# Altium PCB ParallelJoysticksVertical.PcbDoc
Units mm, origin at the board's own origin, x right, y up, seen from the top; angles counter-clockwise.
Board outline 34.8 x 53.2 mm, 4 copper layers (Top Layer, Ground, Signal Middle, Bottom Layer), stack 1.741 mm thick; 9 components, 29 nets, 107 pads, 36 vias.
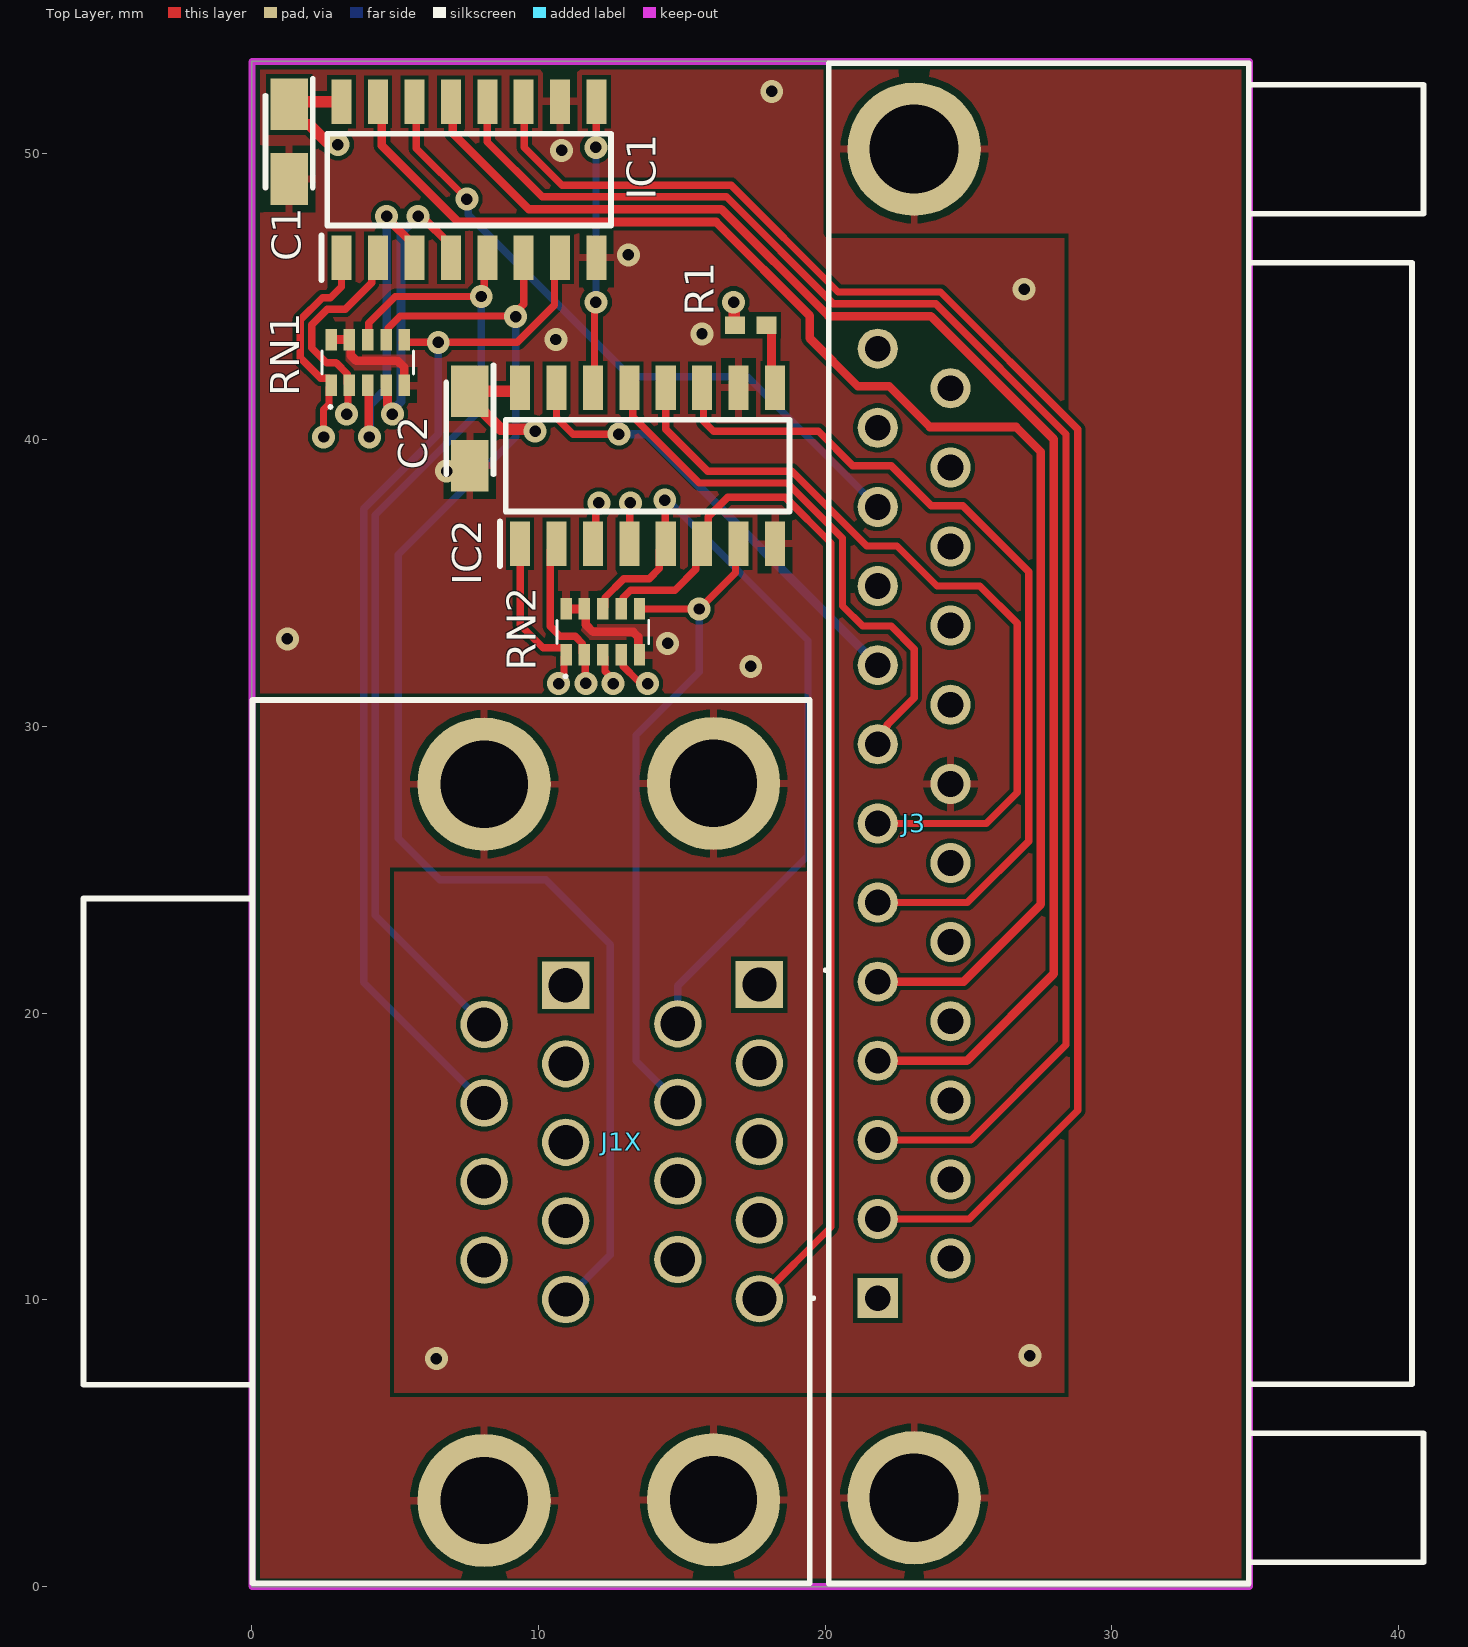
[diagram p0: Top Layer view]
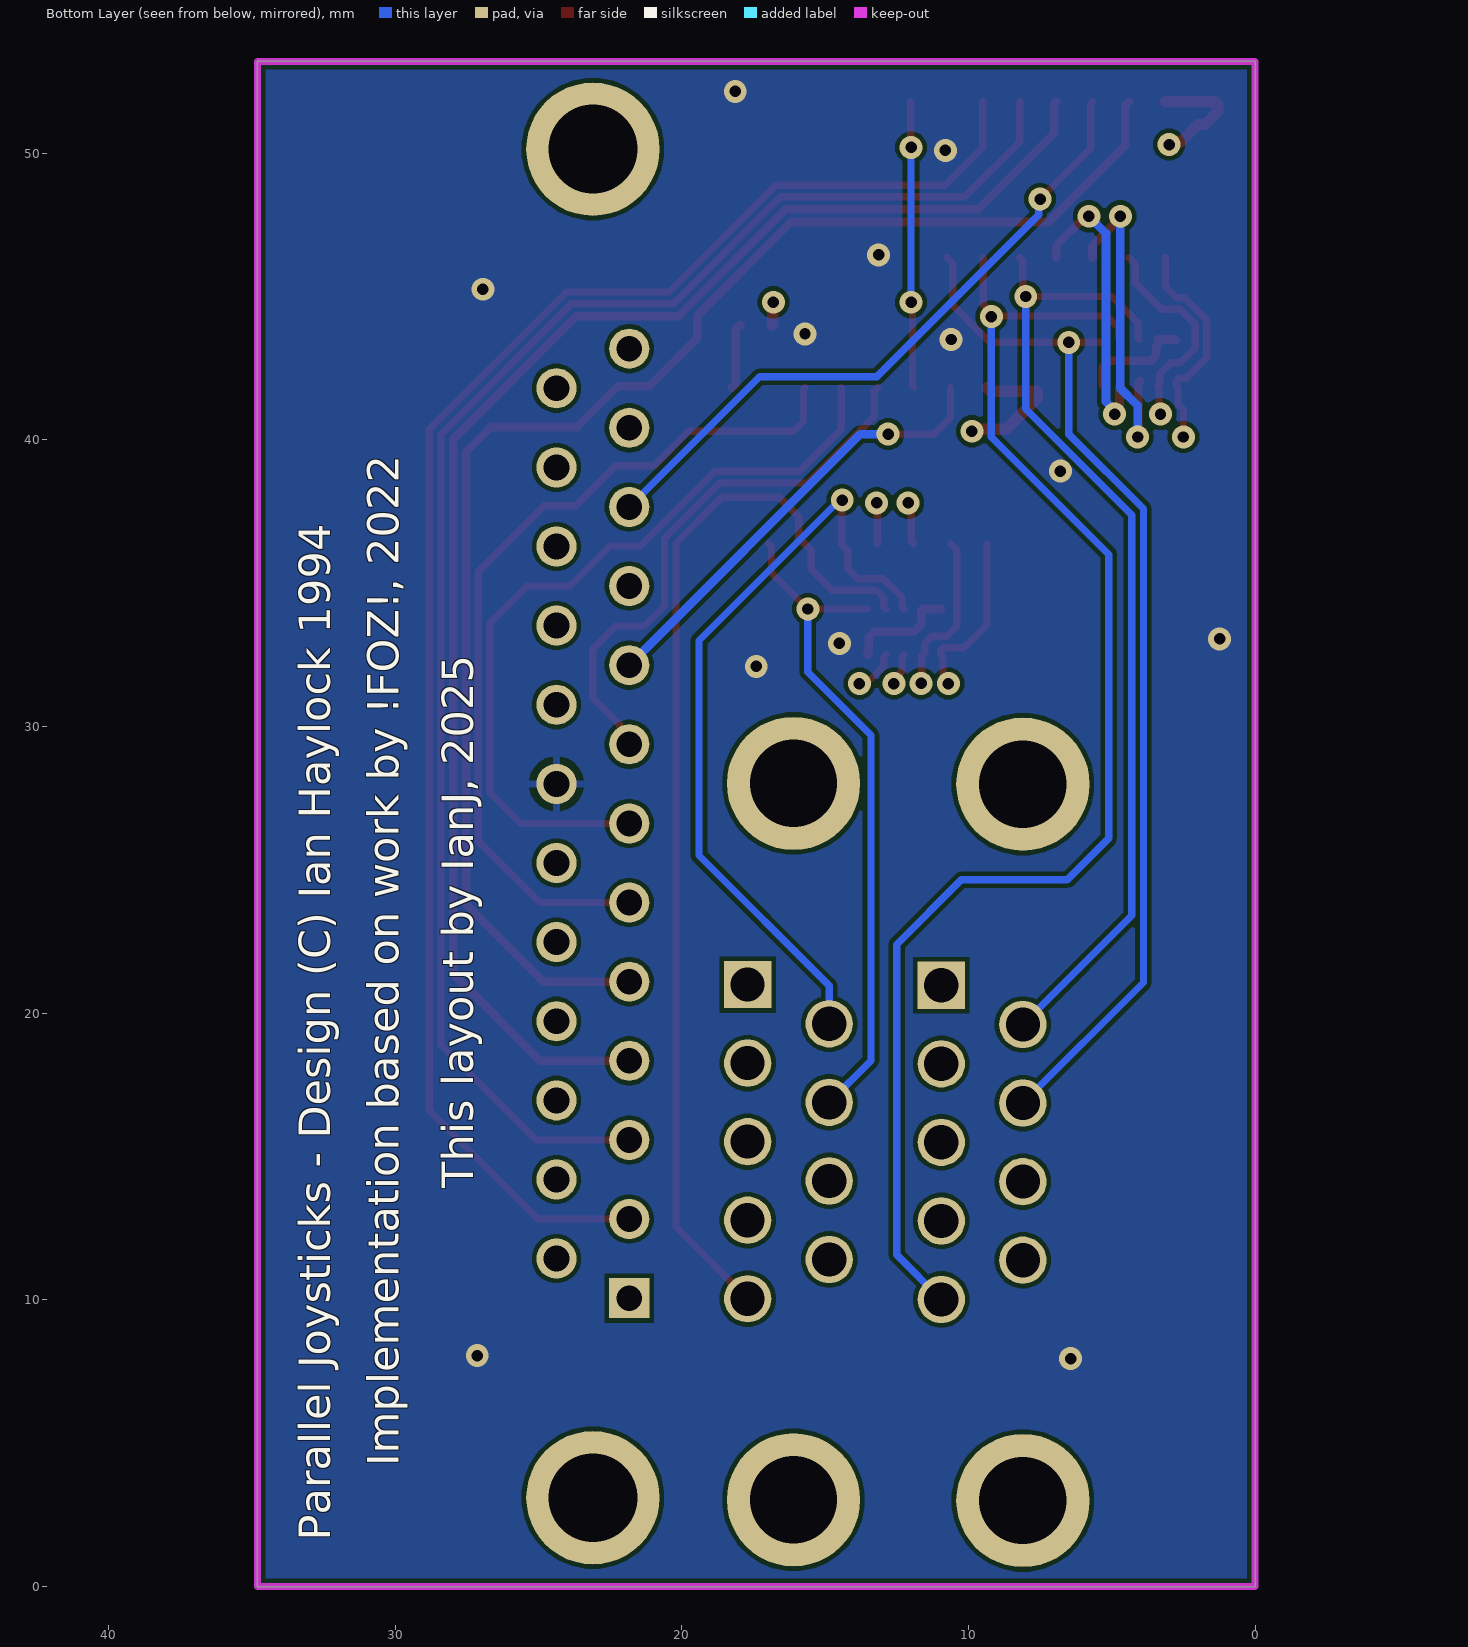
[diagram p1: Bottom Layer view, seen from below]
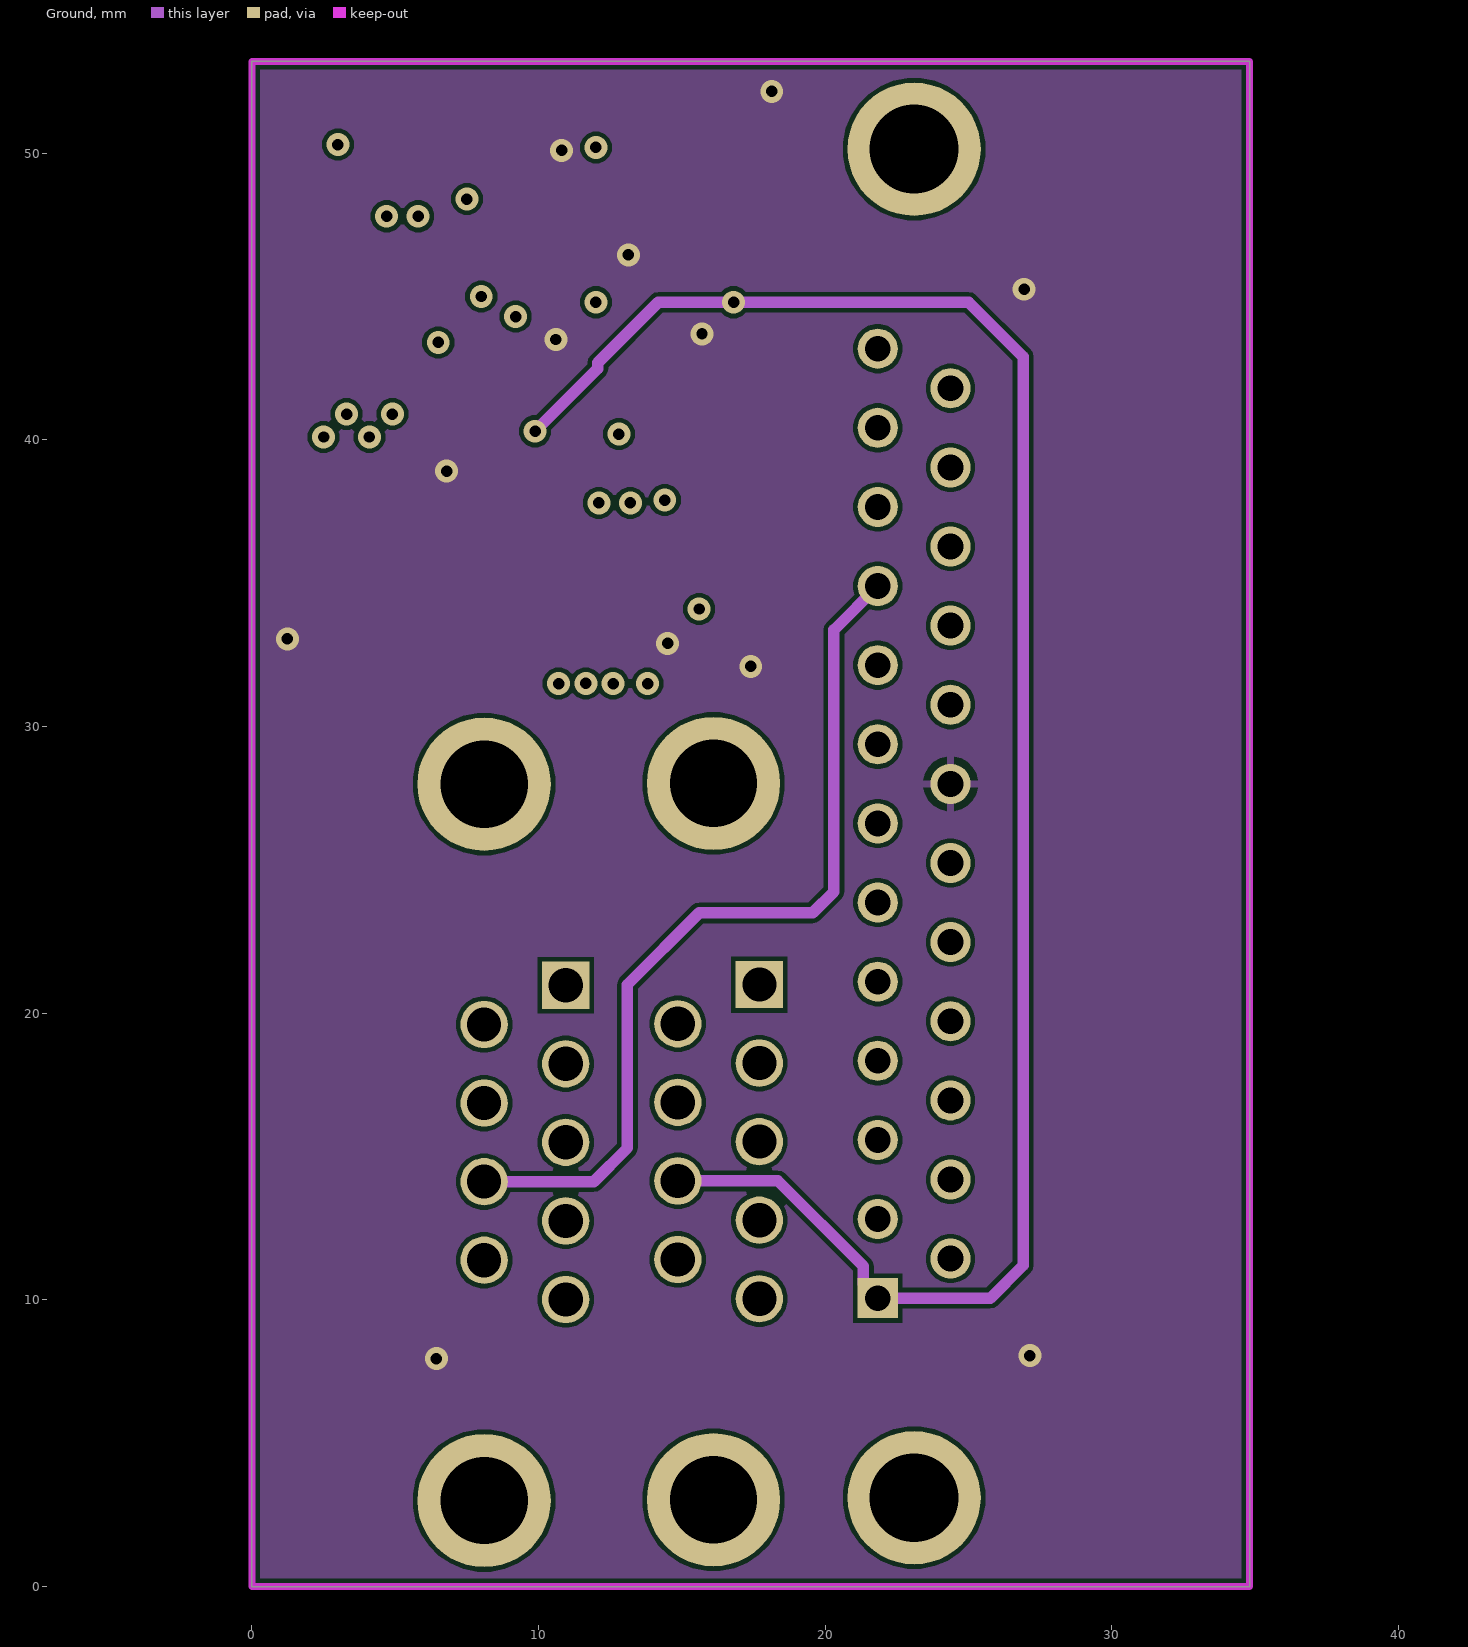
[diagram p2: Ground]
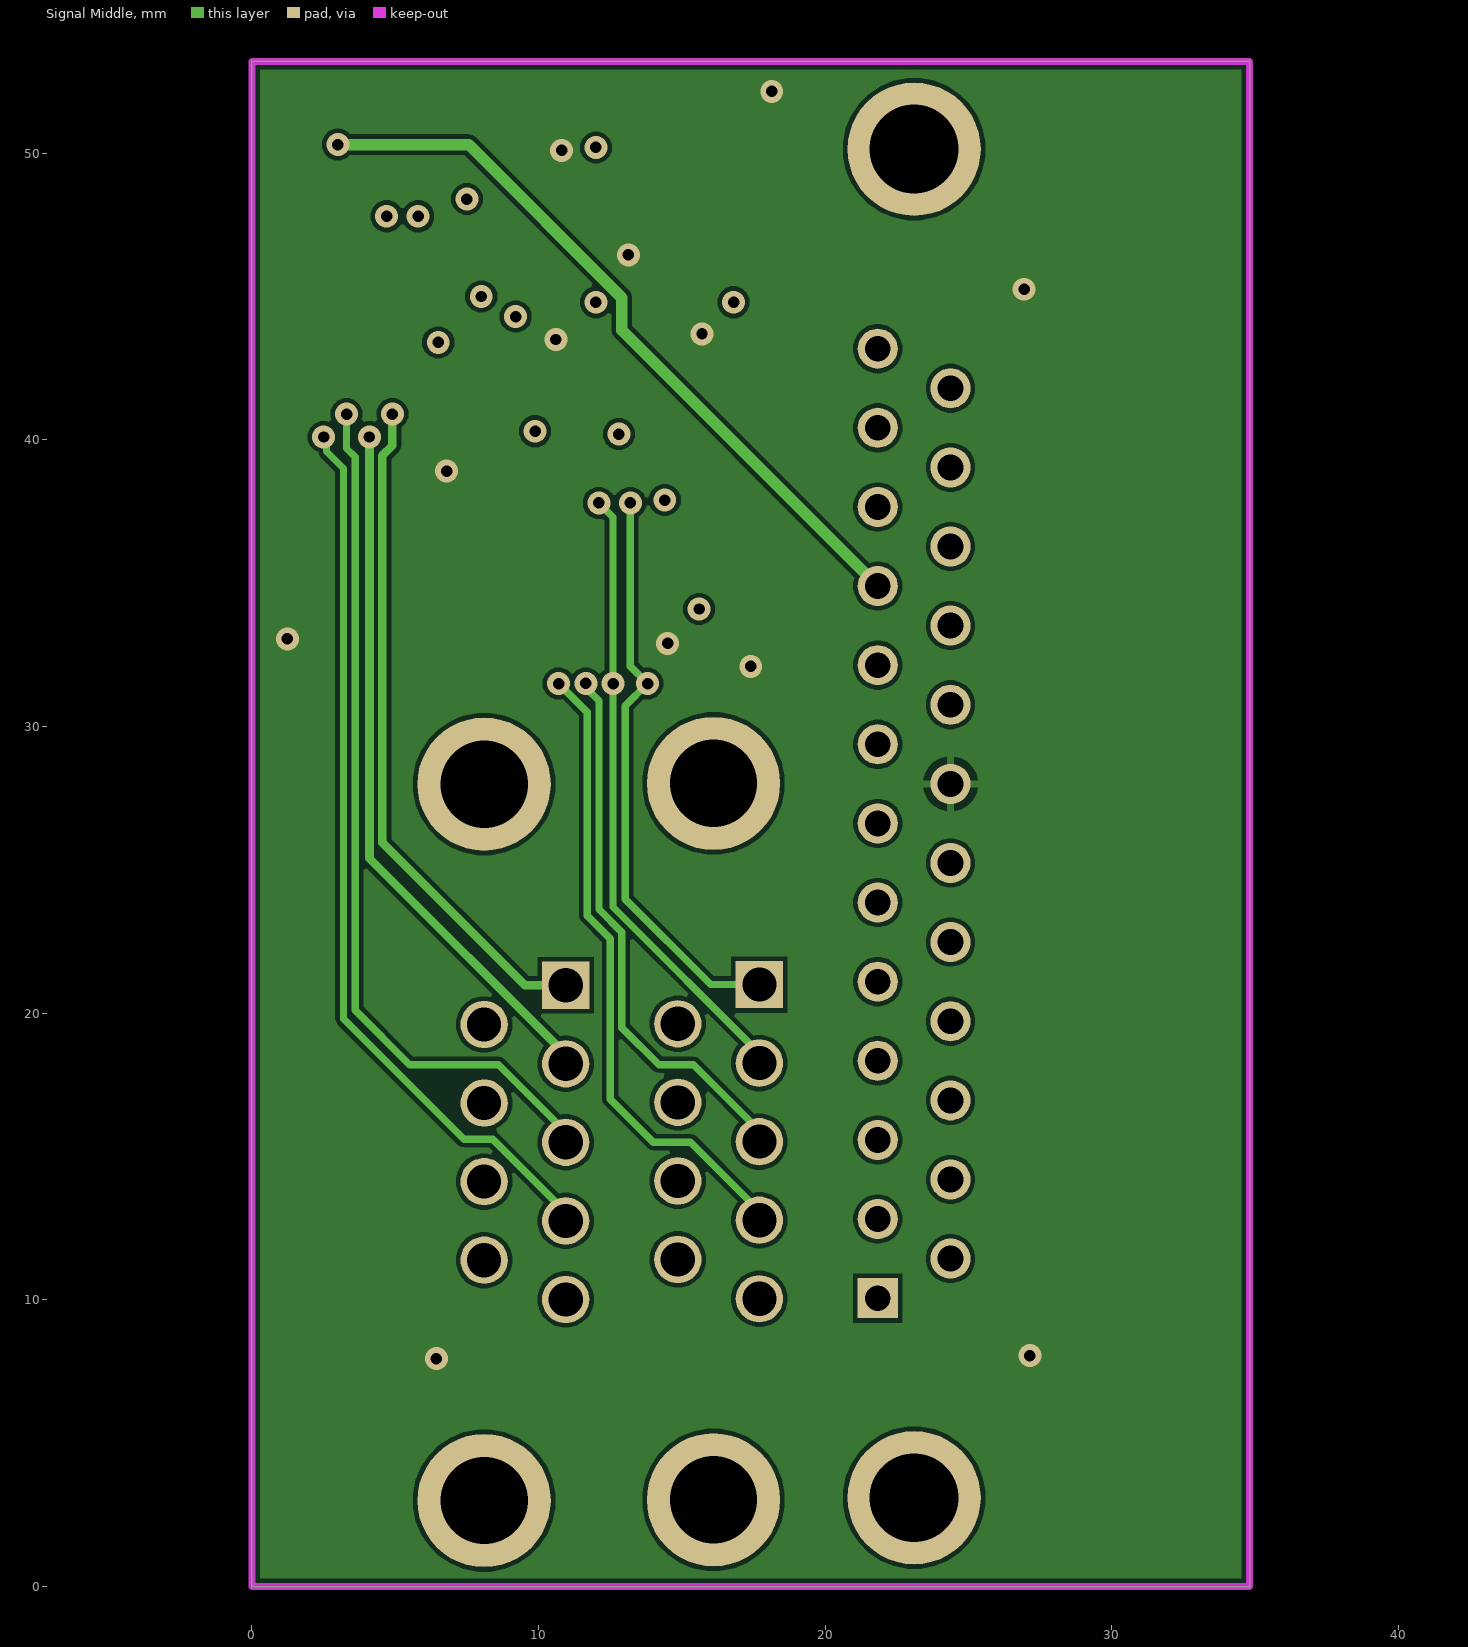
[diagram p3: Signal Middle]
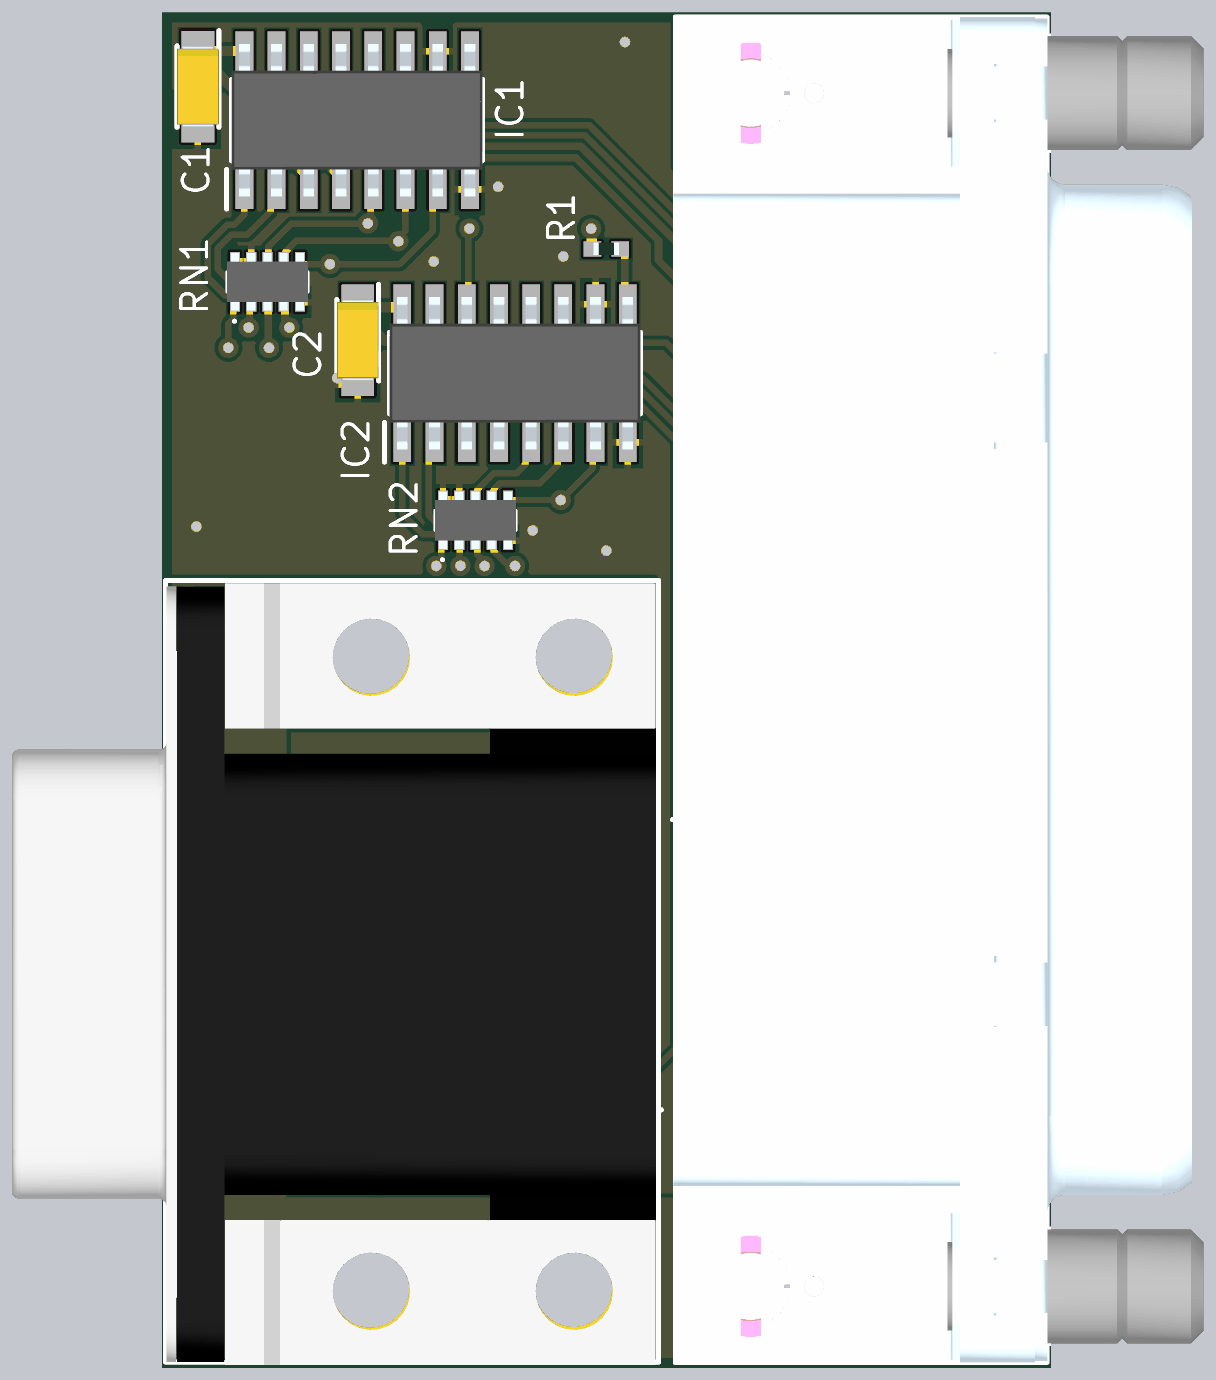
[diagram p4: 3D render of the assembled board from above, using the file's embedded part models]

## Layer stack, top to bottom
Top Solder: solder mask 0.0102, Solder Resist, Dk 3.5
Top Layer: signal copper 0.0356
Dielectric 1: dielectric 0.2, FR-4, Dk 4.8
Ground: signal copper 0.035
Dielectric 2: core 1.2, PP-006, Dk 4.1
Signal Middle: signal copper 0.035
Dielectric2: dielectric 0.2, FR-4, Dk 4.8
Bottom Layer: signal copper 0.0356
Bottom Solder: solder mask 0.0102, Solder Resist, Dk 3.5

## Board outline
0,0 0,53.2 34.8,53.2 34.8,0

## Design rules (kind name [scope] priority, off if disabled: settings)
Clearance [All] p1: gap=0.15 ignorepadtopadclearanceinfootprint=FALSE
HoleSize [All] p1: absolutevalues=TRUE maxlimit=5 minlimit=0.025 maxpercent=80.000 minpercent=20.000
MinimumSolderMaskSliver [All] p1: minsoldermaskwidth=0.05
PolygonConnect [All] p1: connectstyle=Relief reliefconductorwidth=0.254 reliefentries=4 polygonreliefangle="90 Angle" airgapwidth=0.254
RoutingVias [All] p1: holewidth=0.4 width=0.8 viastyle="Through Hole" minholewidth=0.4 minwidth=0.8 maxholewidth=0.8 maxwidth=1.27
SilkToSolderMaskClearance [IsPad] p1 off: minsilkscreentomaskgap=0.254 clearancetoexposedcopper=TRUE
SolderMaskExpansion [All] p1: expansion=0.102 istentingtop=FALSE
SupplyNets "Schematic Supply Nets_4" [InNet('VCCB')] p1: voltage=0.000
SupplyNets "Schematic Supply Nets_3" [InNet('VCCA')] p2: voltage=0.000
SupplyNets "Schematic Supply Nets_2" [InNet('SHLD')] p3: voltage=0.000
SupplyNets "Schematic Supply Nets" [InNet('GND')] p4: voltage=0.000
Width [All] p1: maxlimit=0.5 minlimit=0.254 preferedwidth=0.254 minimp=50.000000 maximp=50.000000 favimp=50.000000
27 further rules are at their usual default settings.

## Components (designator, comment, footprint, x,y, rotation, side; value= is the part's Value field where it differs from the comment)
C1 "10uF_1206" CAPPM3216X180N 1.3,50.4 r270 top
C2 "10uF_1206" CAPPM3216X180N 7.6,40.4 r270 top
IC1 "MC14512BDR2G" SOIC127P600X175-16N 7.575,49.075 r90 top
IC2 "MC14512BDR2G" SOIC127P600X175-16N 13.8,39.1 r90 top
J1X "189-009-613R491" 189-009-613R491 0.023,30.925 r270 top locked
J3 "D25P13A4GL00LF" D25P13A4GV00LF 21.83,10.06 r90 top locked
R1 "100K_0402" RESC1005X40N 17.4,44 r180 top
RN1 "YC158TJR-07100KL" YC158TJR07100KL 4.04,42.7 r90 top
RN2 "YC158TJR-07100KL" YC158TJR07100KL 12.24,33.3 r90 top

## Footprints (in the part's own frame and the unit in brackets; to place one, negate y for a bottom-side part, rotate by r counter-clockwise, add the part's x,y. Pads: shape width x height; smd on the part's side, far side on the other; paste and mask are expansions set on the pad)
189-009-613R491 [mil]
  rect 65x65 hole 47: B1(391.73,430) T1(390.75,696)
  round 65 hole 47: B2(499.61,430) B3(607.48,430) B4(715.35,430) B5(823.23,430) B6(445.67,318) B7(553.54,318) B8(661.42,318) B9(769.29,318) T2(498.62,696) T3(606.5,696) T4(714.37,696) T5(822.24,696) T6(444.69,584) T7(552.56,584) T8(660.43,584) T9(768.31,584)
  round 183.07 hole 120: M1(115.55,318) M2(114.57,633) M3(1099.41,318) M4(1098.43,633)
  silkscreen extent 0,-232 1213,789, body extent 5,-239 1218,761, height 1125
CAPPM3216X180N [mm]
  rect 1.8x1.3 smd: 1(-1.3,0) 2(1.3,0)
  silkscreen extent -2.2,-0.82 1.6,0.82, body extent -1.6,-0.82 1.6,0.82, height 1.8
D25P13A4GV00LF [mm]
  rect 1.4x1.4 hole 0.9: 1(0,0)
  round 1.4 hole 0.9: 2(2.76,0) 3(5.52,0) 4(8.28,0) 5(11.04,0) 6(13.8,0) 7(16.56,0) 8(19.32,0) 9(22.08,0) 10(24.84,0) 11(27.6,0) 12(30.36,0) 13(33.12,0) 14(1.38,-2.54) 15(4.14,-2.54) 16(6.9,-2.54) 17(9.66,-2.54) 18(12.42,-2.54) 19(15.18,-2.54) 20(17.94,-2.54) 21(20.7,-2.54) 22(23.46,-2.54) 23(26.22,-2.54) 24(28.98,-2.54) 25(31.74,-2.54)
  round 4.65 hole 3.1: 26(-6.96,-1.27) 27(40.08,-1.27)
  silkscreen extent -9.95,-19.04 43.07,2.3, body extent -9.96,-19.11 43.08,1.79, height 13.32
RESC1005X40N [mm]
  rect 0.7x0.6 smd: 1(-0.55,0) 2(0.55,0)
  body extent -0.5,-0.25 0.5,0.25, height 0.4
SOIC127P600X175-16N [mm]
  rect 1.55x0.7 smd: 1(-2.725,4.445) 2(-2.725,3.175) 3(-2.725,1.905) 4(-2.725,0.635) 5(-2.725,-0.635) 6(-2.725,-1.905) 7(-2.725,-3.175) 8(-2.725,-4.445) 9(2.725,-4.445) 10(2.725,-3.175) 11(2.725,-1.905) 12(2.725,-0.635) 13(2.725,0.635) 14(2.725,1.905) 15(2.725,3.175) 16(2.725,4.445)
  silkscreen extent -3.5,-4.95 1.6,5.15, body extent -3,-4.95 3,4.95, height 1.75
YC158TJR07100KL [mm]
  rect 0.75x0.4 smd: 1(-0.8,1.28) 2(-0.8,0.64) 3(-0.8,0) 4(-0.8,-0.64) 5(-0.8,-1.28) 6(0.8,1.28) 7(0.8,0.64) 8(0.8,0) 9(0.8,-0.64) 10(0.8,-1.28)
  silkscreen extent -1.6,-1.6 0.4,1.6, body extent -1.13,-1.6 1.13,1.6, height 0.8

## Part data
C1 C2: library part TAJA106M010RNJ, "Capacitor Polarised", Manufacturer_Name="Kyocera AVX", Mouser Part Number=581-TAJA106M010R, Arrow Part Number=TAJA106M010RNJ, Arrow Price/Stock=https://www.arrow.com/en/products/taja106m010rnj/avx?utm_currency=USD&region=nac, Datasheet Link=http://www.farnell.com/datasheets/1680476.pdf, Height=1.8mm, Manufacturer_Part_Number=TAJA106M010RNJ, Mouser Price/Stock=https://www.mouser.co.uk/ProductDetail/KYOCERA-AVX/TAJA106M010RNJ?qs=OVpPYgiJXXXkHCh9%252BEALWw%3D%3D
IC1 IC2: "Integrated Circuit", Manufacturer_Name=onsemi, Mouser Part Number=863-MC14512BDR2G, Arrow Part Number=MC14512BDR2G, Arrow Price/Stock=https://www.arrow.com/en/products/mc14512bdr2g/on-semiconductor, Datasheet Link=https://www.onsemi.com/pub/Collateral/MC14512B-D.PDF, Height=1.75mm, Manufacturer_Part_Number=MC14512BDR2G, Mouser Price/Stock=https://www.mouser.co.uk/ProductDetail/onsemi/MC14512BDR2G?qs=g2rIOKKlpoaxQ58M9hSKIg%3D%3D
J1X: "Connector"
J3: library part D25P13A4GV00LF, "Connector", Manufacturer_Name="Amphenol Communications Solutions", Datasheet Link=https://cdn.amphenol-cs.com/media/wysiwyg/files/drawing/c01-8646-0742.pdf, Height=13.86mm, Manufacturer_Part_Number=D25P13A4GL00LF
R1: library part CRCW0402100KFKEDHP, "Resistor", Manufacturer_Name=Vishay, Mouser Part Number=71-CRCW0402100KFKEDH, Arrow Part Number=CRCW0402100KFKEDHP, Arrow Price/Stock=https://www.arrow.com/en/products/crcw0402100kfkedhp/vishay?utm_currency=USD&region=nac, Datasheet Link=http://www.vishay.com/docs/20035/dcrcwe3.pdf, Height=0.4mm, Manufacturer_Part_Number=CRCW0402100KFKEDHP, Mouser Price/Stock=https://www.mouser.co.uk/ProductDetail/Vishay-Dale/CRCW0402100KFKEDHP?qs=k2%2FDWSARqgGFakjlJe4Ejw%3D%3D
RN1 RN2: "Resistor Network", Manufacturer_Name=KEMET, Mouser Part Number=603-YC158TJR-07100KL, Arrow Part Number=YC158TJR-07100KL, Arrow Price/Stock=https://www.arrow.com/en/products/yc158tjr-07100kl/yageo?region=nac, Datasheet Link=https://media.digikey.com/pdf/Data%20Sheets/Yageo%20PDFs/YC102-358,TC122-164_Series_DS.pdf, Height=0.7mm, Manufacturer_Part_Number=YC158TJR-07100KL, Mouser Price/Stock=https://www.mouser.com/Search/Refine.aspx?Keyword=603-YC158TJR-07100KL

## Via types
v1: diameter 0.8, hole 0.4, Top Layer to Bottom Layer, tented both sides, 36 vias

## Nets (pads, with @x,y where several pads share a name; then routed paths per layer and width w, separated by ;. In a path a pad name is that pad's centre, name@x,y a point inside that pad or via, vN(x,y) a via of type N, cw(c..) or ccw(c..) an arc to the next point about the centre after c; other vN are vias at no path point)
A_1: IC1.11 J3.2 | length 57.3
  Top Layer w0.254: IC1.11 9.5,51.78 9.5,50.2 10.819,48.881 16.719,48.881 20.446,45.154 24.017,45.154 28.804,40.367 28.804,16.604 25.02,12.82 J3.2
A_2: IC2.11 J3.6 | length 30.3
  Top Layer w0.254: IC2.11 15.752,41.778 15.752,40.648 16.1,40.3 19.761,40.3 20.961,39.1 22.3,39.1 23.7,37.7 24.8,37.7 27.096,35.404 27.096,26 24.956,23.86 J3.6
B_1: IC1.12 J3.3 | length 55.1
  Top Layer w0.254: IC1.12 8.21,50.39 10.123,48.477 16.552,48.477 20.279,44.75 23.85,44.75 28.4,40.2 28.4,18.9 25.08,15.58 J3.3
B_2: IC2.12 J3.7 | length 27.7
  Top Layer w0.254: IC2.12 14.435,40.365 15.9,38.9 18.843,38.9 21.443,36.3 22.5,36.3 23.9,34.9 25.392,34.9 26.692,33.6 26.692,27.7 25.612,26.62 J3.7
C_1: IC1.13 J3.4 | length 52.6
  Top Layer w0.3: IC1.13 7,51.74 7,50.7 9.65,48.05 16.375,48.05 20.109,44.316 23.68,44.316 27.973,40.023 27.973,21.373 24.94,18.34 J3.4
C_2: IC2.13 J3.8 | length 19.5
  Top Layer w0.254: IC2.13 13.282,41.708 13.282,40.818 15.604,38.496 18.675,38.496 20.604,36.567 20.604,34.207 21.308,33.503 22.297,33.503 23.1,32.7 23.1,31 22.165,30.065 22.165,30.025 21.83,29.69 J3.8
DIS_1: IC1.15 J3.5 | length 52.1
  Top Layer w0.3: IC1.15 4.531,51.669 4.531,50.269 7.2,47.6 16.188,47.6 19.458,44.331 19.458,43.542 21.126,41.874 22.226,41.874 23.652,40.448 26.652,40.448 27.523,39.577 27.523,23.8 24.823,21.1 J3.5
DIS_2: IC2.15 J3.9 | length 15.8
  Top Layer w0.254: IC2.15 10.625,40.775 11.2,40.2 v1(12.8,40.2)
  Bottom Layer w0.3: v1(12.8,40.2) 13.77,40.2 J3.9
GND: C1.2 C2.2 IC1.8 IC1.10 IC2.8 IC2.10 J3.20 RN1.5 RN1.6 RN1.7 RN2.5 RN2.6 RN2.7 | length 7.6
  Top Layer w0.3: RN1.6@2.76,43.45 2.81,43.5 RN1.7 ; RN1.7@3.4,43.325 3.45,43.275 3.45,42.95 3.638,42.762 5.082,42.762 5.32,42.524 RN1.5 ; RN2.6 RN2.7 11.65,34.05 11.65,33.55 11.9,33.3 13.294,33.3 13.47,33.124 13.47,32.55 RN2.5
  other v1: 6.434,7.954 27.134,8.054 17.4,32.1 14.5,32.9 1.234,33.054 6.791,38.909 10.6,43.5 15.7,43.7 26.934,45.254 13.134,46.454 10.8,50.1 18.134,52.154
NetIC2_9: IC2.9 R1.1 | length 2.3
  Top Layer w0.3: R1.1 17.973,44 18.123,43.85 18.123,41.947 IC2.9
SHLD: J1X.M1 J1X.M2 J1X.M3 J1X.M4 J3.26 J3.27
VCCA: C1.1 IC1.16 J1X.B8 J3.10 | length 61.2
  Top Layer w0.4: v1(3,50.3) 2.923,50.377 2.623,50.377 2,51 1.75,51 1.3,51.45 C1.1 1.4,51.8 IC1.16
  Ground w0.4: J1X.B8 11.925,14.125 13.1,15.3 13.1,21 15.6,23.5 19.561,23.5 20.3,24.239 20.3,33.37 J3.10
  Signal Middle w0.4: v1(3,50.3) 7.561,50.3 12.9,44.961 12.9,43.83 J3.10
VCCB: C2.1 IC2.16 J1X.T8 J3.1 R1.2 | length 71.8
  Top Layer w0.4: IC2.16 9.23,41.7 C2.1 7.6,41.45 8.677,40.373 9.804,40.373 v1(9.877,40.3) ; v1(16.8,44.8) 16.825,44.775 16.825,44.025 R1.2
  Ground w0.4: v1(9.877,40.3) 12.065,42.488 12.065,42.688 14.177,44.8 16.7,44.8 16.8,44.7 16.9,44.8 25,44.8 26.9,42.9 26.9,11.2 25.76,10.06 J3.1 21.33,10.56 21.33,11.17 18.35,14.15 J1X.T8
X0_1: IC1.1 J1X.B4 RN1.1 | length 39.2
  Top Layer w0.254: v1(2.5,40.1) 2.5,41.057 2.687,41.244 2.687,41.827 RN1.1 2.76,42.073 2.687,42.146 2.401,42.146 1.685,42.862 1.685,44.185 2.46,44.96 2.742,44.96 3.125,45.343 3.125,46.345 IC1.1
  Signal Middle w0.254: v1(2.5,40.1) 2.604,39.996 2.604,39.596 3.196,39.004 3.196,19.804 7.4,15.6 8.4,15.6 10.945,13.055 J1X.B4
X0_2: IC2.1 J1X.T4 RN2.1 | length 28.5
  Top Layer w0.254: IC2.1 9.355,33.545 10.152,32.748 10.887,32.748 10.96,32.675 RN2.1 10.887,32.427 10.887,31.837 10.698,31.648 v1(10.698,31.5)
  Signal Middle w0.254: v1(10.698,31.5) 10.698,31.496 11.7,30.494 11.7,23.4 12.5,22.6 12.5,17 14,15.5 15.3,15.5 17.701,13.099 J1X.T4
X1_1: IC1.2 J1X.B3 RN1.2 | length 37.9
  Top Layer w0.254: v1(3.3,40.9) 3.35,40.95 3.35,41.85 RN1.2 3.327,41.973 3.327,42.3 2.937,42.69 2.603,42.69 2.089,43.205 2.089,44.017 2.627,44.556 3.256,44.556 4.177,45.477 4.177,46.127 IC1.2
  Signal Middle w0.254: v1(3.3,40.9) 3.3,39.7 3.6,39.4 3.6,20.1 5.5,18.2 8.6,18.2 10.945,15.855 J1X.B3
X1_2: IC2.2 J1X.T3 RN2.2 | length 25
  Top Layer w0.254: IC2.2 10.402,36.152 10.402,33.498 10.748,33.152 11.275,33.152 11.527,32.9 11.527,32.573 11.636,32.464 11.624,32.451 11.624,31.528 v1(11.648,31.504)
  Signal Middle w0.254: v1(11.648,31.504) 11.648,31.356 12.104,30.9 12.104,23.625 12.904,22.825 12.904,19.496 14.2,18.2 15.4,18.2 17.291,16.309 ; 17.291,16.308 17.701,15.898 J1X.T3
X2_1: IC1.3 J1X.B2 RN1.3 | length 36.5
  Top Layer w0.3: RN1.3@4,42.052 4.07,41.982 4.07,40.13 v1(4.1,40.1) ; v1(4.7,47.8) 4.7,47.745 5.67,46.775 IC1.3
  Signal Middle w0.3: v1(4.1,40.1) 4.1,25.4 10.945,18.555 J1X.B2
  Bottom Layer w0.3: v1(4.1,40.1) 4.1,41.2 4.7,41.8 v1(4.7,47.8)
X2_2: IC2.3 J1X.T2 RN2.3 | length 24.5
  Top Layer w0.254: IC2.3 11.998,36.478 11.998,37.698 v1(12.1,37.8) ; RN2.3 12.313,32.427 12.313,31.931 12.598,31.646 v1(12.598,31.498)
  Signal Middle w0.254: v1(12.1,37.8) 12.598,37.302 v1(12.598,31.498) 12.598,23.702 17.701,18.599 J1X.T2
X3_1: IC1.4 J1X.B1 RN1.4 | length 33.9
  Top Layer w0.3: RN1.4 4.73,41.85 4.73,41.205 4.9,41.035 v1(4.9,40.9) ; v1(5.8,47.8) 5.915,47.8 6.94,46.775 IC1.4
  Signal Middle w0.3: v1(4.9,40.9) 4.9,39.8 4.55,39.45 4.55,25.95 9.525,20.975 J1X.B1
  Bottom Layer w0.3: v1(4.9,40.9) 4.9,41.026 5.2,41.326 5.2,47.2 v1(5.8,47.8)
X3_2: IC2.4 J1X.T1 RN2.4 | length 23.3
  Top Layer w0.254: RN2.4 12.953,32.427 12.953,32.1 13.449,31.604 13.696,31.604 v1(13.8,31.5) ; IC2.4 13.183,36.393 13.183,37.783 v1(13.2,37.8)
  Signal Middle w0.254: v1(13.2,37.8) 13.2,32.1 v1(13.8,31.5) 13.027,30.727 13.027,23.973 16,21 J1X.T1
X4_1: IC1.5 J1X.B6 RN1.8 | length 34.8
  Top Layer w0.254: RN1.8 4.073,43.533 4.073,44.073 5,45 v1(8,45) 8.104,45.104 8.104,46.244 IC1.5
  Bottom Layer w0.254: v1(8,45) 8,41.076 4.3,37.376 4.3,23.405 J1X.B6
X4_2: IC2.5 J1X.T6 RN2.8 | length 27.5
  Top Layer w0.254: RN2.8 12.313,34.173 12.313,34.5 12.972,35.158 13.858,35.158 14.212,35.512 14.212,36.152 IC2.5 14.417,36.393 14.417,37.882 v1(14.4,37.9)
  Bottom Layer w0.254: v1(14.4,37.9) 14.5,37.9 19.4,33 19.4,25.5 14.856,20.956 J1X.T6
X5_1: IC1.6 J1X.B5 RN1.9 | length 49.1
  Top Layer w0.254: RN1.9 4.753,43.573 4.753,43.9 5.176,44.323 9.177,44.323 v1(9.2,44.3) 9.2,44.448 9.48,44.728 IC1.6
  Bottom Layer w0.254: v1(9.2,44.3) 9.2,40.1 5.1,36 5.1,26.1 6.548,24.653 10.247,24.653 12.5,22.399 12.5,11.57 J1X.B5
X5_2: IC2.6 J1X.T5 RN2.9 | length 38
  Top Layer w0.254: RN2.9 12.953,34.173 12.953,34.5 13.208,34.754 14.754,34.754 15.482,35.482 15.482,36.152 15.918,36.588 15.918,37.318 16.6,38 18.6,38 20.2,36.4 20.2,12.539 J1X.T5
X6_1: IC1.7 J1X.B7 RN1.10 | length 36.9
  Top Layer w0.254: RN1.10@5.24,43.4 v1(6.5,43.4) 9.257,43.4 10.551,44.693 10.551,46.151 IC1.7
  Bottom Layer w0.254: v1(6.5,43.4) 6.5,40.2 3.896,37.596 3.896,21.069 J1X.B7
X6_2: IC2.7 J1X.T7 RN2.10 | length 23.6
  Top Layer w0.254: RN2.10 v1(15.6,34.1) 16.868,35.368 16.868,36.268 IC2.7
  Bottom Layer w0.254: J1X.T7 13.4,18.346 13.4,29.7 15.6,31.9 v1(15.6,34.1)
X7_2: IC1.9 IC2.14 | length 10
  Top Layer w0.254: IC2.14 11.947,41.878 11.947,44.748 v1(12,44.8) ; v1(12,50.2) 12.01,50.21 12.01,51.79 IC1.9
  Bottom Layer w0.254: v1(12,44.8) v1(12,50.2)
Z_1: IC1.14 J3.11 | length 23.2
  Top Layer w0.254: IC1.14 5.735,51.735 5.735,50.165 v1(7.5,48.4)
  Bottom Layer w0.254: v1(7.5,48.4) 7.548,48.352 7.548,47.852 13.2,42.2 17.29,42.2 J3.11
pads on no net: J1X.B9 J1X.T9 J3.12 J3.13 J3.14 J3.15 J3.16 J3.17 J3.18 J3.19 J3.21 J3.22 J3.23 J3.24 J3.25

## Polygon pours and split planes (outlines as drawn)
SHLD on Top Layer "SHLD_L01_P000" (solid, remove dead copper, pour order 0): 20.1,53.2 20.107,53.193 34.8,53.193 34.8,0 -0.014,0 -0.014,30.786 0.2,31 19.3,31 19.3,25.1 4.8,25.1 4.8,6.6 28.5,6.6 28.5,47.2 20.1,47.2 20.1,53.1
GND on Top Layer "NONET_L-01_P-001" (solid, remove dead copper, pour order 2): 0.175,0 34.8,0 34.8,53.2 0.015,53.2
GND on Bottom Layer "NONET_L-01_P-001" (solid, remove dead copper, pour order 1): 0.176,0 34.8,0 34.8,53.2 0.015,53.2
GND on Signal Middle "GND_L03_P003" (solid, remove dead copper, pour order 3): 0,0 34.8,0 34.8,53.2 0,53.2
GND on Ground "GND_L02_P004" (solid, remove dead copper, pour order 4): -0.014,0 34.8,0 34.8,53.193 -0.185,53.308

## Keep-outs
Keep-Out Layer:
  the board outline again, w0.254

## Silkscreen, mask and mechanical layers (free items; w line width, h text height)
Bottom Overlay:
  text "This layout by IanJ, 2025" at 27.267,13.9 h1.1 r270
  text "Implementation based on work by !FOZ!, 2022" at 29.867,4.2 h1.1 r270
  text "Parallel Joysticks - Design (C) Ian Haylock 1994" at 32.267,1.6 h1.1 r270
Board Shape:
  the board outline again, w0.254